# Altium PCB main.PcbDoc
Units mm, origin at the board's own origin, x right, y up, seen from the top; angles counter-clockwise.
Board outline 45 x 46.5 mm, 2 copper layers (Top Layer, Bottom Layer); 28 components, 20 nets, 111 pads, 10 vias.
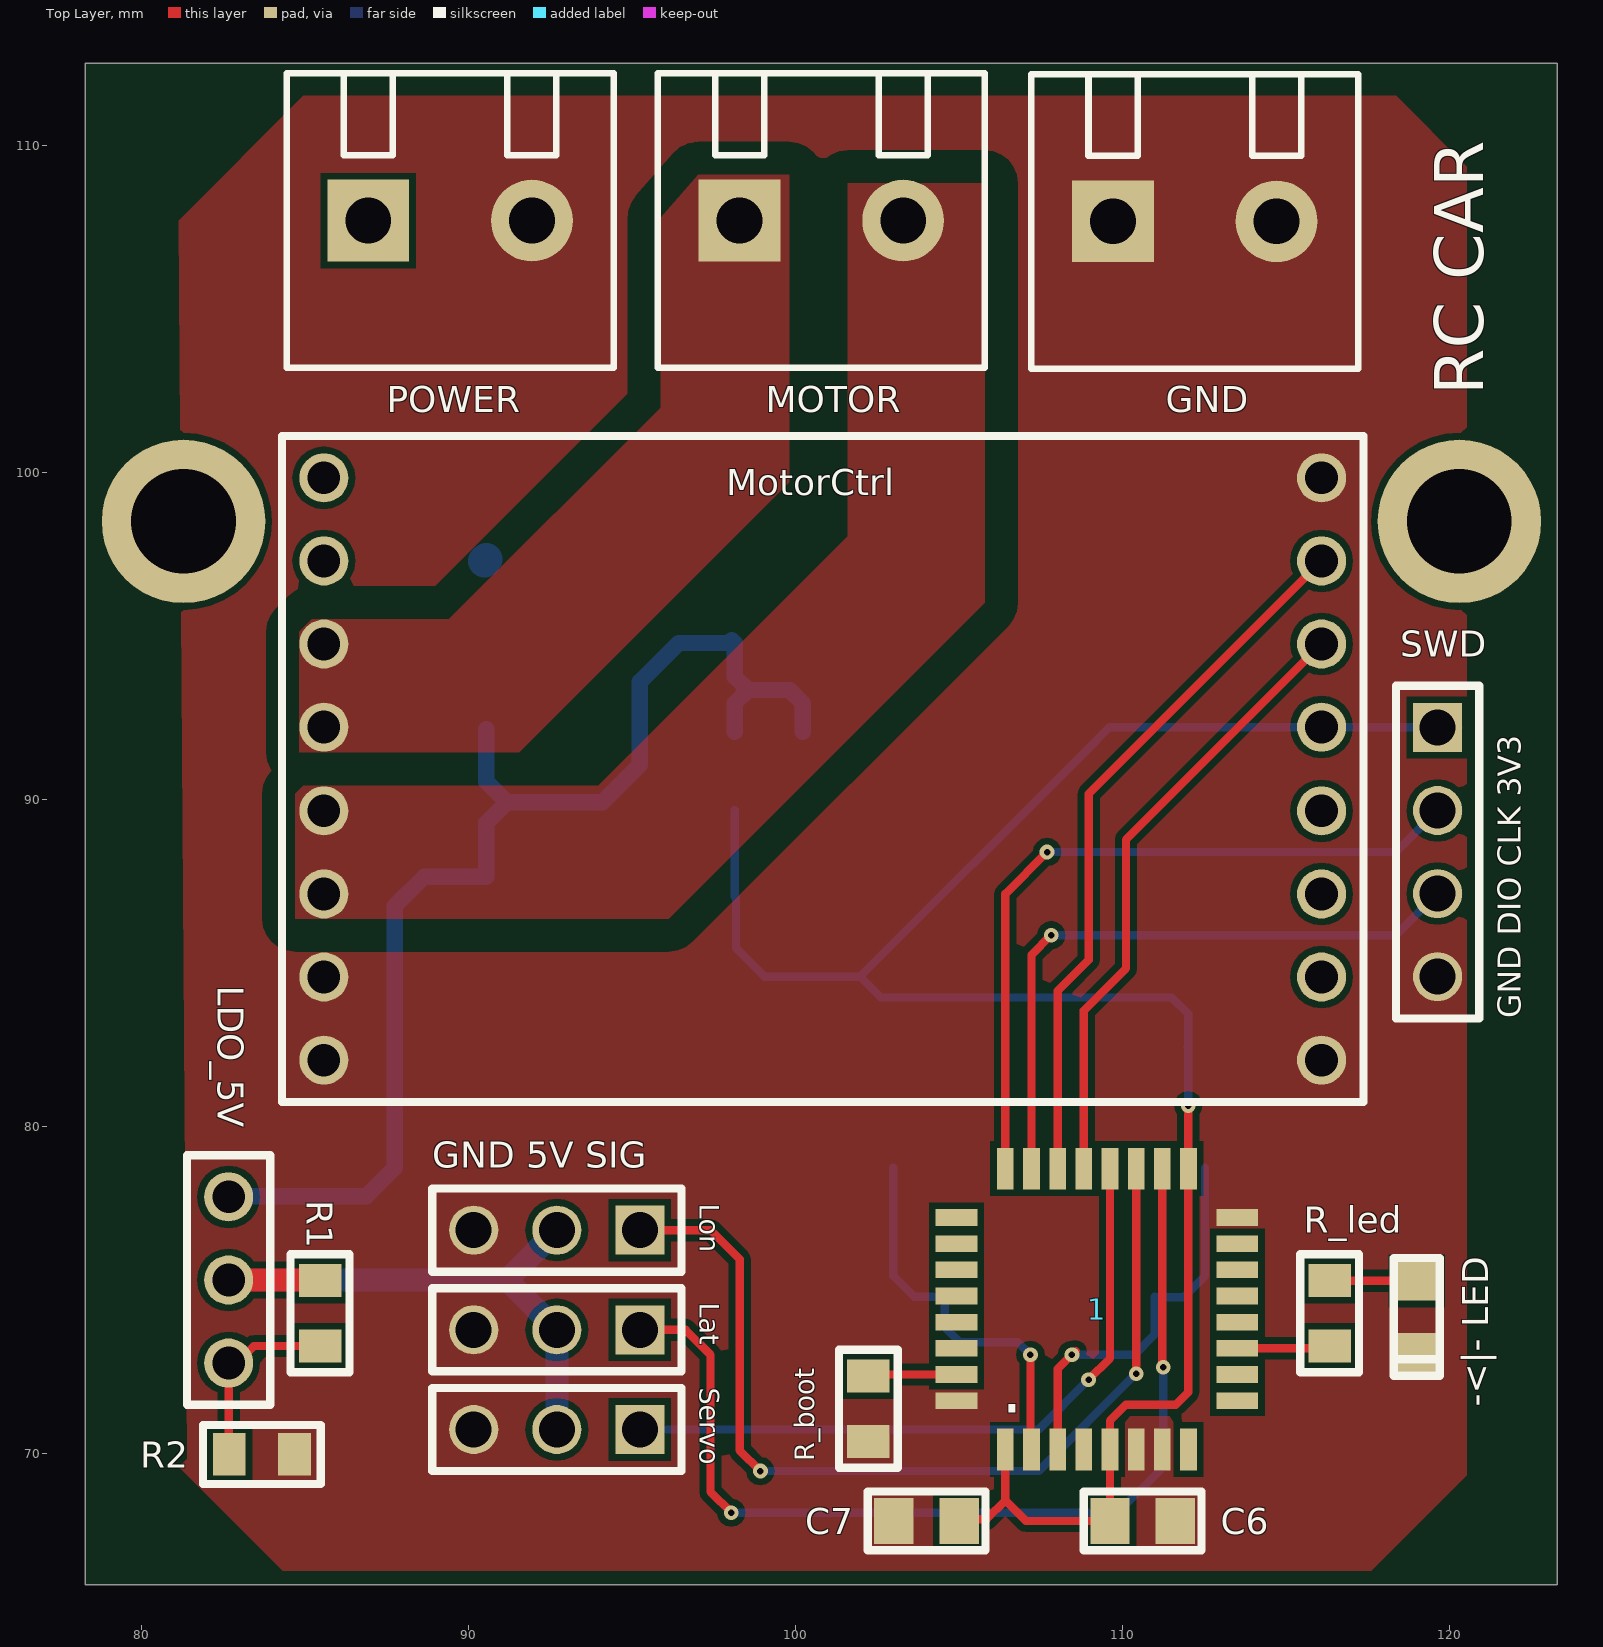
[diagram p0: Top Layer view]
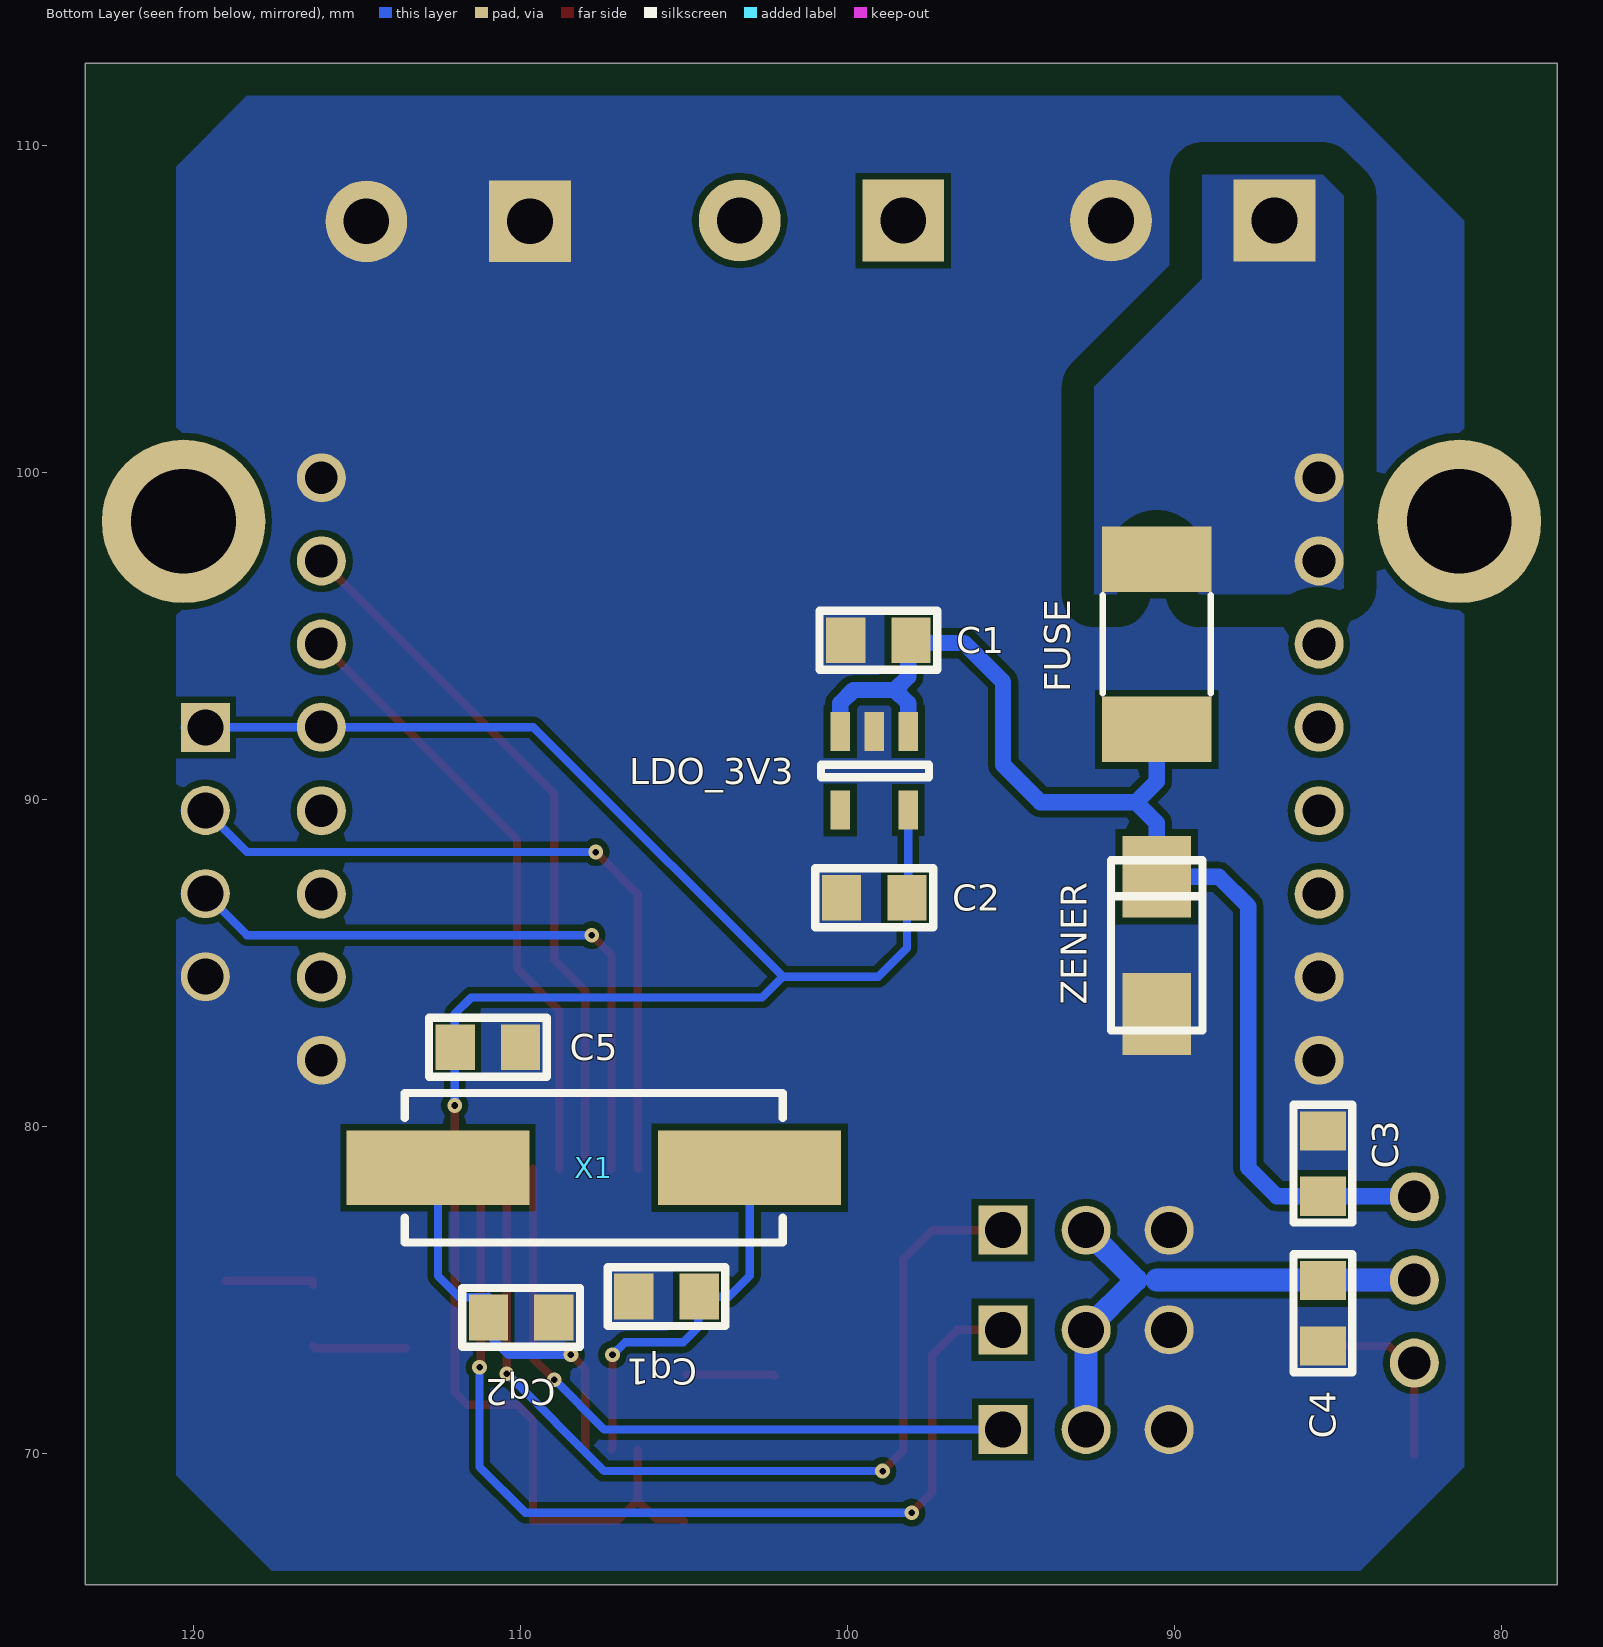
[diagram p1: Bottom Layer view, seen from below]

## Layer stack, top to bottom
Top Solder: solder mask 0.0102, Solder Resist, Dk 3.5
Top Layer: signal copper 0.0356
Dielectric 1: dielectric 0.32, FR-4, Dk 4.8
Bottom Layer: signal copper 0.0356
Bottom Solder: solder mask 0.0102, Solder Resist, Dk 3.5

## Board outline
78.3,66 78.3,112.5 123.3,112.5 123.3,66

## Design rules (kind name [scope] priority, off if disabled: settings)
Clearance Clearance_polygon [InNamedPolygon('9V6_L02_P000') OR InNamedPolygon('NETMOTOR_2_L01_P003') OR InNamedPolygon('NETMOTOR_1_L01_P002')] p1: gap=1 ignorepadtopadclearanceinfootprint=FALSE
Clearance [All] p2: gap=0.2 ignorepadtopadclearanceinfootprint=FALSE
HoleSize [All] p1: absolutevalues=TRUE maxlimit=100 minlimit=0.025 maxpercent=80.000 minpercent=20.000
MinimumSolderMaskSliver [All] p1: minsoldermaskwidth=0
PolygonConnect [All] p1: connectstyle=Direct reliefconductorwidth=0.254 reliefentries=4 polygonreliefangle="90 Angle" airgapwidth=0.254
RoutingVias [All] p1: holewidth=0.2 width=0.45 viastyle="Through Hole" minholewidth=0.2 minwidth=0.45 maxholewidth=0.2 maxwidth=0.45
SilkToSolderMaskClearance [IsPad] p1: minsilkscreentomaskgap=0 clearancetoexposedcopper=TRUE
SolderMaskExpansion [All] p1: expansion=0.102 istentingtop=FALSE
Width [All] p1: maxlimit=10 minlimit=0.254 preferedwidth=0.254
27 further rules are at their usual default settings.

## Components (designator, comment, footprint, x,y, rotation, side; value= is the part's Value field where it differs from the comment)
1 "STM32F030" TQFP32-08 109.22,74.422 r90 top
"-<|- LED" "LED Red" FP_0805_LED_RED 118.999,75.184 r270 top (schematic designator LED)
C1 "1uF" FP_0805_CAP_085 99.06,94.869 r180 bottom
C2 "1uF" FP_0805_CAP_085 99.187,86.995 r0 bottom
C3 "100nF" FP_0805_CAP_085 85.471,78.867 r270 bottom
C4 "1uF" FP_0805_CAP_085 85.471,74.295 r90 bottom
C5 "100nF" FP_0805_CAP_085 110.998,82.423 r0 bottom
C6 "100nF" FP_0805_CAP_085 110.617,67.945 r180 top
C7 "100nF" FP_0805_CAP_085 104.013,67.945 r0 top
Cq1 "22pF" FP_0805_CAP_085 105.537,74.803 r180 bottom
Cq2 "=Value" FP_0805_CAP_085 109.982,74.168 r0 bottom
FUSE "Fuse" FP_1812_MULTIFUSE 90.551,94.742 r90 bottom
GND "Connector_2pin" PT_2-5 112.268,107.823 r90 top
Lat "Connector" FP_CONN3_TUSKE_254MM 95.25,73.787 r90 top (schematic designator InRecvLat)
LDO_3V3 "RT9013 LDO Voltage Regulator" RT9013_SOT23 98.147,92.075 r270 bottom
LDO_5V "LM338" LM338 82.677,75.311 r270 top
Lon "Connector" FP_CONN3_TUSKE_254MM 95.25,76.835 r90 top (schematic designator InRecvLon)
MOTOR "Connector_2pin" PT_2-5 100.853,107.846 r90 top
MotorCtrl "MD01 Motor controller" MD01 100.838,90.932 r180 top
POWER "Connector_2pin" PT_2-5 89.503,107.846 r90 top
R1 "1K" FP_0805_RES 85.471,74.295 r270 top
R2 "3K3" FP_0805_RES 83.693,69.977 r180 top
R_boot "10K" FP_0805_RES 102.235,71.374 r90 top
R_led "1K" FP_0805_RES 116.332,74.295 r270 top
Servo "Connector" FP_CONN3_TUSKE_254MM 95.25,70.739 r90 top
SWD "Connector" FP_CONN4_TUSKE_254MM 119.634,92.202 r180 top
X1 "8MHz" FP_CRYSTAL_HC49_SMD 112.522,78.74 r180 bottom
ZENER "ZENER" FP_SMA 90.551,83.439 r90 bottom

## Footprints (in the part's own frame and the unit in brackets; to place one, negate y for a bottom-side part, rotate by r counter-clockwise, add the part's x,y. Pads: shape width x height; smd on the part's side, far side on the other; paste and mask are expansions set on the pad)
FP_0805_CAP_085 [mm] "0805 kapacitás YAGEO 0.85mm magas"
  rect 1.2x1.4 smd: 1(-1,0) 2(1,0)
  silkscreen extent -1.8,-0.9 1.8,0.9, body extent -1,-0.64 1.03,0.64, height 0.85
FP_0805_LED_RED [mm] "0805 méretû piros LED"
  rect 1.2x1.3 smd: A(-0.1,0) K(2.1,0)
  silkscreen extent -0.8,-0.7 2.8,0.7, body extent 0.01,-0.63 2.03,0.62, height 1.1
FP_0805_RES [mm] "0805 ellenállás"
  rect 1x1.3 smd: 1(-1,0) 2(1,0)
  silkscreen extent -1.8,-0.9 1.8,0.9, body extent -1,-0.62 1,0.63, height 0.62
FP_1812_MULTIFUSE [mm]
  rect 2x3.35 smd: 1(-2.6,0) 2(2.6,0)
  silkscreen extent -1.5,-1.65 1.5,1.65, body extent -2.36,-1.71 2.37,1.71, height 1.25
FP_CONN3_TUSKE_254MM [mm] "3×1 tüskesor"
  rect 1.5x1.5 hole 1.1: 1(0,0)
  round 1.5 hole 1.1: 2(0,2.54) 3(0,5.08)
  silkscreen extent -1.27,-1.27 1.27,6.35, body extent -1.27,-1.27 1.27,6.35, height 8.54
FP_CONN4_TUSKE_254MM [mm] "4×1 tüskesor"
  rect 1.5x1.5 hole 1.1: 1(0,0)
  round 1.5 hole 1.1: 2(0,2.54) 3(0,5.08) 4(0,7.62)
  silkscreen extent -1.27,-1.27 1.27,8.9, body extent -1.27,-1.27 1.27,8.89, height 8.54
FP_CRYSTAL_HC49_SMD [mil] "HC49/SMD"
  rect 220x90 smd: 1(0,0) 2(375,0)
  silkscreen extent -40,-90 415,90, body extent -57,-90 432,90, height 130
FP_SMA [mm] "SMA DO-214AC tok"
  rect 2.5x2.1 smd: 1(0,0) 2(4.2,0)
  silkscreen extent -0.5,-1.4 4.7,1.4, body extent -0.5,-1.3 4.7,1.3, height 2.42
LM338 [mm] "LM338 Voltage regulator"
  round 1.5 hole 1: ADJ(2.54,0) Vin(-2.54,0) Vout(0,0)
  silkscreen extent -3.81,-1.27 3.81,1.27
MD01 [mm] "Motor controller"
  round 1.5 hole 1: 1(-15.25,8.9) 2(-15.25,6.36) 3(-15.25,3.82) 4(-15.25,1.28) 5(-15.25,-1.28) 6(-15.25,-3.82) 7(-15.25,-6.36) 8(-15.25,-8.9) 9(15.25,-8.9) 10(15.25,-6.36) 11(15.25,-3.82) 12(15.25,-1.28) 13(15.25,1.28) 14(15.25,3.82) 15(15.25,6.36) 16(15.25,8.9)
  silkscreen extent -16.53,-10.18 16.53,10.18
PT_2-5 [mm] "PCB terminal block, nominal current: 32 A, nom. voltage: 400 V, pitch: 5 mm, number of positions: 2"
  rect 2.5x2.5 hole 1.4: 1(-0.15,2.555)
  round 2.5 hole 1.4: 2(-0.15,-2.445)
  silkscreen extent -4.65,-4.95 4.35,5.05, body extent -4.65,-4.95 4.35,5.05, height 13.55
RT9013_SOT23 [mm] "RT9013 LDO Voltage Regulator"
  rect 1.2x0.6 smd: EN(0,-2.08) GND(0,-1.04) NC(2.4,-2.08) Vin(0,0) Vout(2.4,0)
  silkscreen extent 1.02,-2.67 1.4,0.63
TQFP32-08 [mil]
  rect 50x20 smd: 1(-169,110.24) 2(-169,78.74) 3(-169,47.24) 4(-169,15.75) 5(-169,-15.75) 6(-169,-47.24) 7(-169,-78.74) 8(-169,-110.24) 17(169,-110.24) 18(169,-78.74) 19(169,-47.24) 20(169,-15.75) 21(169,15.75) 22(169,47.24) 23(169,78.74) 24(169,110.24)
  rect 20x50 smd: 9(-110.24,-169) 10(-78.74,-169) 11(-47.24,-169) 12(-15.75,-169) 13(15.75,-169) 14(47.24,-169) 15(78.74,-169) 16(110.24,-169) 25(110.24,169) 26(78.74,169) 27(47.24,169) 28(15.75,169) 29(-15.75,169) 30(-47.24,169) 31(-78.74,169) 32(-110.24,169)

## Part data
1: Package=TQFP32-08, DeviceSetName=STM32F030, GateName_1=G$1, LibraryName=stm32F030x, SymbolName_1=STM32F030X
"-<|- LED": "Red LED", I_max=20mA, Name="MULTICOMP  MCL-S270SRC  LED, Red, SMD, 1.25mm x 1.4mm, 20 mA, 1.85 V, 643 nm", Reference=1581239, Supplier=Farnell, U_fw=1.85V, Wavelength=643nm
C1 C2 C4: library part "CAP 1uF", "Capacitor", Tolerance=+80%/-20%, Voltage=25V, Name="SMD Multilayer Ceramic Capacitor, 0805", Reference=1828853, Supplier=Farnell
C3 C5 C6 C7: library part "CAP 100nF", "Capacitor", Tolerance=+80%/-20%, Voltage=25V, Name="SMD Multilayer Ceramic Capacitor, 0805", Reference=1759167, Supplier=Farnell
Cq1 Cq2: library part "CAP 22pF", "Capacitor", Tolerance=5%, Voltage=50V, Name="SMD Multilayer Ceramic Capacitor, 0805", Reference=1759195, Supplier=Farnell
Lat Lon Servo: library part Connector_3pin, "3pin connector"
LDO_3V3: library part RT9013, "LDO Voltage Regulator"
LDO_5V: "Voltage regulator", Name="LM338 Voltage regulator", Reference=32-04-33, Supplier=Lomex
MotorCtrl: library part MD01, "Motor controller module"
R1 R_led: library part "RES 1K", "Resistor", Power=125mW, Tolerance=5%, Name="YAGEO (PHYCOMP)  RC0805JR-071KL  SMD Chip Resistor, Thick Film, 1 kohm", Reference=9234004, Supplier=Farnell
R2: library part "RES 3K3", "Resistor", Power=125mW, Tolerance=1%, Name="YAGEO (PHYCOMP)  RC0805FR-073K3L  SMD Chip Resistor, Thick Film, 3.3 kohm, 150 V, 0805 [2012 Metric], 125 mW, ± 1%, RC Series", Reference=9237682, Supplier=Farnell
R_boot: library part "RES 10K", "Resistor", Power=125mW, Tolerance=5%, Name="YAGEO (PHYCOMP)  RC0805JR-0710KL  SMD Chip Resistor, Thick Film, 10 kohm", Reference=9234136, Supplier=Farnell
SWD: library part Connector_4pin, "4pin Connector"
X1: library part Crystal, "Quarz Crystal"
ZENER: "Zener Diode", U_Z=24

## Free pads (board coordinates)
  round 5 hole 3.2: 0(81.3,98.5) 0(120.3,98.5)

## Via types
v1: diameter 0.45, hole 0.2, Top Layer to Bottom Layer, 10 vias

## Nets (pads, with @x,y where several pads share a name; then routed paths per layer and width w, separated by ;. In a path a pad name is that pad's centre, name@x,y a point inside that pad or via, vN(x,y) a via of type N, cw(c..) or ccw(c..) an arc to the next point about the centre after c; other vN are vias at no path point)
3V3: 1.1 1.5 1.17 C2.1 C5.2 C6.2 C7.2 LDO_3V3.Vout MotorCtrl.5 SWD.1 | length 64.4
  Top Layer w0.254: C7.2 105.067,67.999 105.845,67.999 106.42,68.574 ; 1.1 106.42,68.574 ; v1(112.014,80.645) 112.014,78.721 1.17 112.014,78.709 112.014,71.882 111.633,71.501 110.109,71.501 109.62,71.012 1.5 109.62,67.948 C6.2 107.049,67.945 106.42,68.574
  Bottom Layer w0.254: LDO_3V3.Vout 98.147,87.035 C2.1 98.187,85.455 99.06,84.582 101.981,84.582 ; v1(112.014,80.645) 112.014,82.407 C5.2 112.014,82.439 112.014,83.439 111.506,83.947 102.616,83.947 101.981,84.582 ; SWD.1@120.269,92.202 SWD.1 119.624,92.212 MotorCtrl.5 109.611,92.212 108.839,91.44 101.981,84.582
5V: C4.2 Lat.2 LDO_5V.Vout Lon.2 R1.1 Servo.2 | length 18
  Top Layer w0.254: R1.1@85.455,75.311 R1.1
  Top Layer w0.7: LDO_5V.Vout R1.1@85.455,75.311
  Bottom Layer w0.7: LDO_5V.Vout 90.551,75.311 ; Servo.2 Lat.2 91.186,75.311 Lon.2
9V6: FUSE.2 MotorCtrl.9 MotorCtrl.10 POWER.1 | length 0.1
  Bottom Layer w1: FUSE.2@90.501,97.292 FUSE.2
GND: 1.6 1.7 1.16 1.32 "-<|- LED.K" C1.1 C2.2 C3.1 C4.1 C5.1 C6.1 C7.1 Cq1.1 Cq2.1 GND.1 GND.2 Lat.3 LDO_3V3.GND Lon.3 MotorCtrl.1 MotorCtrl.8 MotorCtrl.15 MotorCtrl.16 POWER.2 R2.1 R_boot.1 Servo.3 SWD.4 ZENER.1
IN_LAT: 1.18 Lat.1 | length 30.5
  Top Layer w0.254: Lat.1 96.647,73.787 97.409,73.025 97.409,68.834 v1(98.044,68.199) ; 1.18 111.22,72.676 v1(111.252,72.644)
  Bottom Layer w0.254: v1(98.044,68.199) 109.855,68.199 111.252,69.596 v1(111.252,72.644)
IN_LON: 1.19 Lon.1 | length 29.1
  Top Layer w0.254: Lon.1 97.409,76.835 98.298,75.946 98.298,70.104 v1(98.933,69.469) ; v1(110.42,72.447) 1.19
  Bottom Layer w0.254: v1(98.933,69.469) 107.442,69.469 v1(110.42,72.447)
Net1_2: 1.2 Cq1.2 X1.2 | length 11.9
  Top Layer w0.254: v1(107.188,73.025) 107.188,70.161 1.2
  Bottom Layer w0.254: X1.2 102.997,75.438 103.632,74.803 Cq1.2 ; Cq1.2@104.537,74.168 Cq1.2@104.564,74.141 ; Cq1.2@104.564,74.776 Cq1.2@104.564,74.141 ; v1(107.188,73.025) 106.807,73.406 105.029,73.406 104.564,73.871 Cq1.2@104.564,74.141
Net1_3: 1.3 Cq2.2 X1.1 | length 12.6
  Top Layer w0.254: 1.3 108.02,72.587 v1@108.569,73.136 ; v1@108.569,73.136 v1(108.458,73.025) v1@108.569,73.136
  Bottom Layer w0.254: v1(108.458,73.025) 110.363,73.025 110.982,73.644 Cq2.2@110.982,74.803 ; Cq2.2 Cq2.2@111.004,74.146 ; Cq2.2@111.004,74.781 111.865,74.781 112.522,75.438 X1.1
Net1_11: 1.11 R_led.2 | length 2.8
  Top Layer w0.254: 1.11 116.259,73.222 R_led.2
Net1_31: 1.31 R_boot.2 | length 2.7
  Top Layer w0.254: R_boot.2 102.283,72.422 1.31
NetC1_2: C1.2 C3.2 FUSE.1 LDO_3V3.EN LDO_3V3.Vin LDO_5V.Vin ZENER.2 | length 37.9
  Bottom Layer w0.5: LDO_5V.Vin 82.693,77.867 C3.2 86.884,77.867 87.757,78.74 87.757,86.741 88.655,87.639 ZENER.2 90.551,89.281 91.186,89.916 ; FUSE.1 90.551,90.551 91.186,89.916 ; LDO_3V3.Vin 98.147,92.94 98.552,93.345 ; LDO_3V3.EN 100.227,92.94 99.822,93.345 98.552,93.345 ; 91.186,89.916 94.107,89.916 95.25,91.059 95.25,93.599 96.433,94.782 97.973,94.782 C1.2 98.147,94.782 98.147,93.75 98.552,93.345
NetLDO_5V_ADJ: LDO_5V.ADJ R1.2 R2.2 | length 5.8
  Top Layer w0.254: R2.2 82.677,69.993 LDO_5V.ADJ 82.925,72.771 83.449,73.295 R1.2
NetLED_1: "-<|- LED.A" R_led.1 | length 2.7
  Top Layer w0.254: R_led.1@116.332,75.168 R_led.1@116.343,75.157 ; R_led.1@116.343,75.284 118.999,75.284
NetMOTOR_1: MOTOR.1 MotorCtrl.11 MotorCtrl.12
NetMOTOR_2: MOTOR.2 MotorCtrl.13 MotorCtrl.14
OUT_DIR: 1.22 MotorCtrl.7 | length 21.9
  Top Layer w0.254: 1.22 108.02,84.144 108.966,85.09 108.966,90.17 MotorCtrl.7
OUT_PWM: 1.21 MotorCtrl.6 | length 19
  Top Layer w0.254: 1.21 108.82,83.547 110.109,84.836 110.109,88.773 MotorCtrl.6
OUT_SERVO: 1.20 Servo.1 | length 21.1
  Top Layer w0.254: v1(108.966,72.263) 109.62,72.917 1.20
  Bottom Layer w0.254: Servo.1 107.442,70.739 v1(108.966,72.263)
SYS_SWCLK: 1.24 SWD.2 | length 23.1
  Top Layer w0.254: 1.24 106.42,87.116 v1(107.696,88.392)
  Bottom Layer w0.254: v1(107.696,88.392) 118.364,88.392 SWD.2 ; SWD.2@119.951,89.344 SWD.2@120.269,89.662
SYS_SWDIO: 1.23 SWD.3 | length 20.2
  Top Layer w0.254: 1.23 107.22,85.249 v1(107.823,85.852)
  Bottom Layer w0.254: v1(107.823,85.852) 118.364,85.852 SWD.3 ; SWD.3@119.951,86.804 SWD.3@120.269,87.122
pads on no net: 1.4 1.8 1.9 1.10 1.12 1.13 1.14 1.15 1.25 1.26 1.27 1.28 1.29 1.30 LDO_3V3.NC MotorCtrl.2 MotorCtrl.3 MotorCtrl.4

## Polygon pours and split planes (outlines as drawn)
GND on Bottom Layer "GND_L02_P005" (solid, remove dead copper, pour order 5): 84.963,111.506 81.153,107.696 81.153,69.596 84.328,66.421 117.602,66.421 120.523,69.342 120.523,109.347 118.364,111.506
9V6 on Bottom Layer "9V6_L02_P000" (solid, pour order 0): 85.471,109.093 84.836,108.458 84.836,96.266 92.456,96.266 92.456,102.616 89.154,105.918 89.154,109.093
GND on Top Layer "GND_L01_P004" (solid, remove dead copper, pour order 4): 81.153,107.696 81.407,69.85 81.153,69.596 84.328,66.421 117.602,66.421 120.523,69.342 120.523,109.347 118.364,111.506 84.963,111.506
NetMOTOR_2 on Top Layer "NETMOTOR_2_L01_P003" (solid, pour order 3): 84.963,90.424 84.709,90.17 84.709,86.36 96.139,86.36 105.791,96.012 105.791,108.839 101.6,108.839 101.6,98.044 93.98,90.424
NetMOTOR_1 on Top Layer "NETMOTOR_1_L01_P002" (solid, pour order 2): 85.217,95.504 84.836,95.123 84.836,91.44 91.567,91.44 99.822,99.695 99.822,109.093 97.028,109.093 95.885,107.787 95.885,101.981 89.408,95.504

## Silkscreen, mask and mechanical layers (free items; w line width, h text height)
Top Overlay:
  text "RC CAR" at 121.031,102.362 h1.5 r90
  text "GND DIO CLK 3V3" at 122.174,83.312 h0.7 r90
  text "GND 5V SIG" at 88.9,78.74 h0.8
  text "." at 106.299,71.247 h1.52
Mechanical 1:
  the board outline again, w0.5